# Altium PCB Pannel3.5x3.PcbDoc (part 3 of 4)
Units mil, origin at the board's own origin, x right, y up, seen from the top; angles counter-clockwise.
Board outline 3543.31 x 2771.65 mil, 4 copper layers (SIGNAL, GROUND, PWR, SIGNAL (Bottom)), stack 61.627 mil thick; 234 components, 186 nets, 894 pads, 439 vias.
Unrouted connection lines stored in the file: 4.
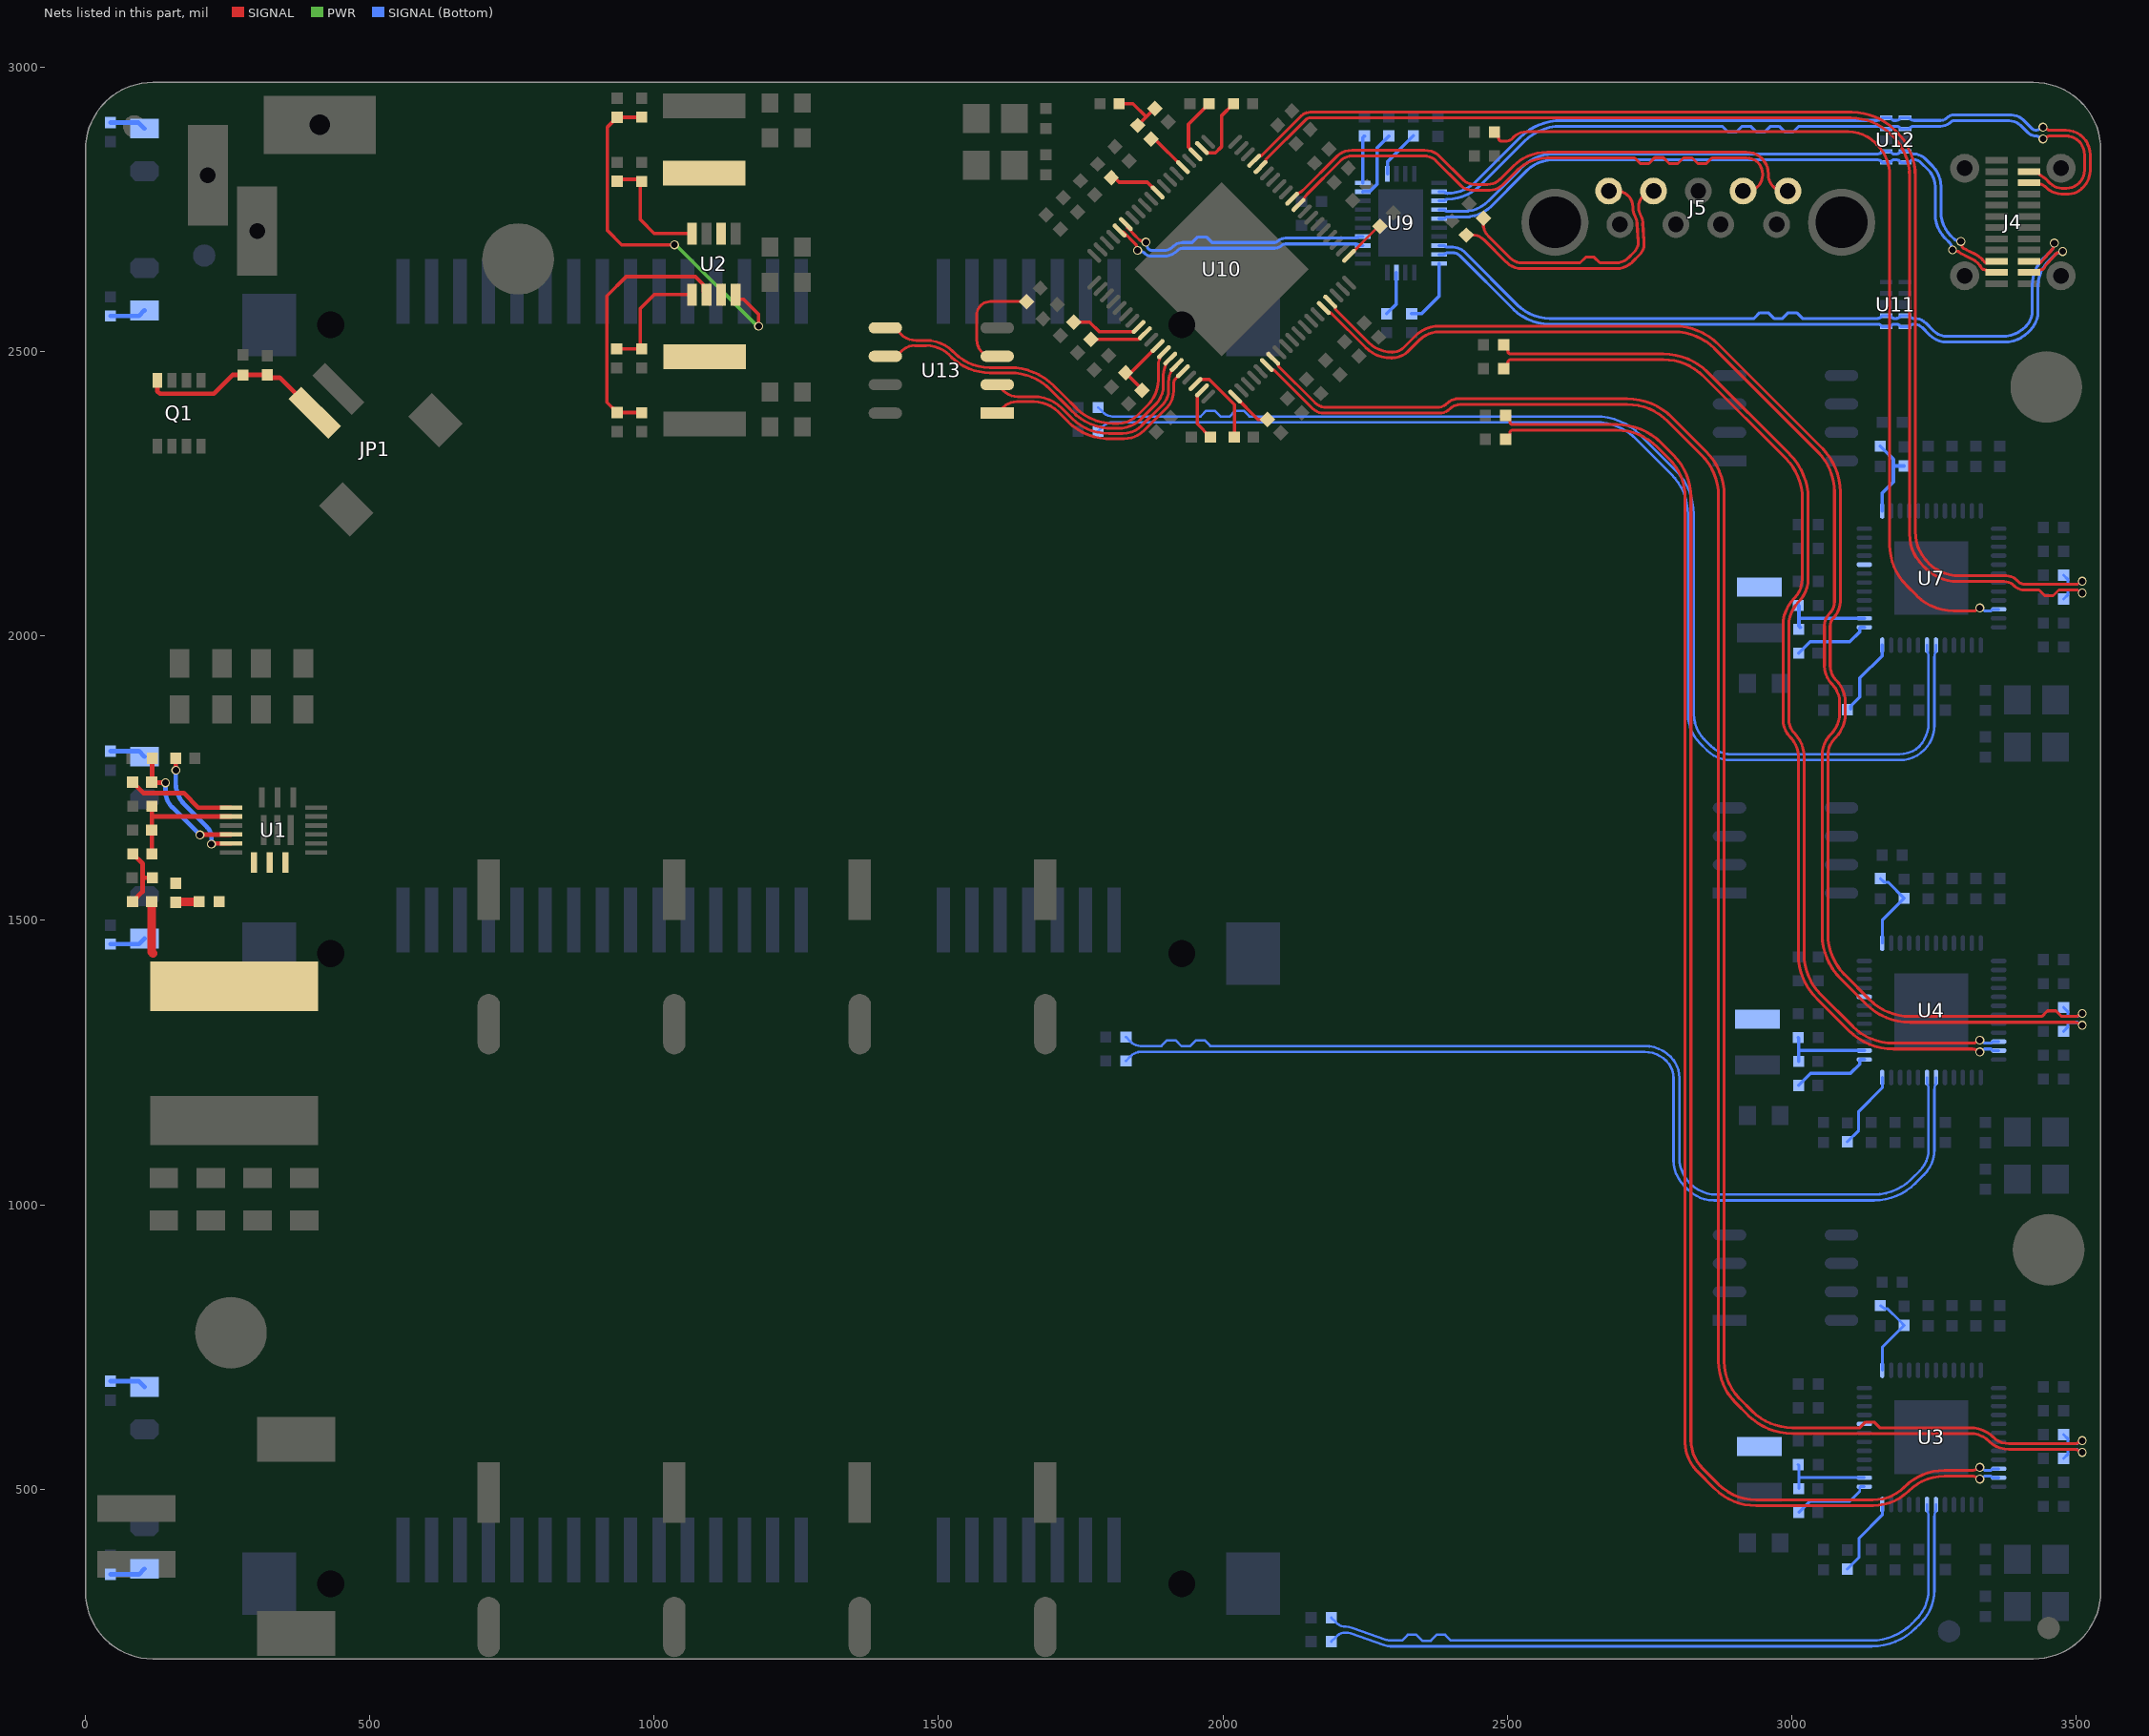
[diagram p5: the nets of this part, all layers, seen from the top]

## Via types
v1: diameter 15.75, hole 11.81, SIGNAL to SIGNAL (Bottom), tented both sides, 439 vias

## Nets (pads, with @x,y where several pads share a name; then routed paths per layer and width w, separated by ;. In a path a pad name is that pad's centre, name@x,y a point inside that pad or via, vN(x,y) a via of type N, cw(c..) or ccw(c..) an arc to the next point about the centre after c; other vN are vias at no path point) (continued)
IN_SSRX2_N: J4.A10 U9.8 U11.4 U11.7 | length 1344.5
  SIGNAL w5.1: J4.A10@3417.35,2659.1 3427.74,2659.1 cw(c3427.74,2650.92) 3433.52,2656.71 3434.48,2656.54 3435.57,2656.54 ccw(c3435.57,2661.64) 3439.65,2658.58 cw(c3473.65,2633.51) 3443.25,2662.85 3443.55,2663.15 ccw(c3439.88,2666.69) 3443.65,2663.26 ; 3443.67,2663.28 3454.16,2675.12 3457.84,2679.27 cw(c3469.21,2669.19) 3458.47,2679.94 ccw(c3454.86,2683.54) 3459.81,2682.3 v1(3462,2691)
  SIGNAL (Bottom) w5.1: U9.8@2379.93,2686.63 2387.78,2686.63 cw(c2387.78,2681.81) 2391.19,2685.22 ccw(c2394.6,2688.63) 2394.6,2683.8 2404.87,2683.8 cw(c2404.87,2656.47) 2424.2,2675.8 2517.9,2582.1 ccw(c2574.82,2639.02) 2574.82,2558.52 2919,2558.52 2934,2558.52 2944,2568.52 2959,2568.52 2969,2558.52 2984,2558.52 2994,2568.52 3009,2568.52 3019,2558.52 3058,2558.52 3150.78,2558.52 ccw(c3150.78,2568.72) 3157.99,2561.51 3157.99,2561.93 3158.68,2562.62 cw(c3160.36,2560.95) 3160.36,2563.32 U11.7@3166.56,2563.32 3171.79,2563.32 cw(c3171.79,2558.58) 3175.13,2561.93 3175.14,2561.51 3176.63,2560.02 ccw(c3180.24,2563.62) 3180.24,2558.52 3183.65,2558.52 ccw(c3183.65,2568.72) 3190.86,2561.51 3190.86,2561.93 3191.56,2562.62 cw(c3193.23,2560.95) 3193.23,2563.32 U11.4@3199.44,2563.32 3205.64,2563.32 cw(c3205.64,2560.95) 3207.32,2562.62 3208.01,2561.93 3208.01,2561.51 ccw(c3215.22,2568.72) 3215.22,2558.52 3215.85,2558.52 cw(c3215.85,2529.77) 3236.18,2550.1 3249.43,2536.85 ccw(c3273.21,2560.63) 3273.21,2527 3370.32,2527 ccw(c3370.32,2585.91) 3411.97,2544.25 ; 3411.99,2544.28 ccw(c3384.6,2571.62) 3423.31,2571.62 3423.31,2616.89 cw(c3490.62,2616.89) 3443.02,2664.49 3457.3,2678.77 ; 3457.31,2678.78 ccw(c3450.87,2685.2) 3459.96,2685.2 3459.96,2686.08 cw(c3466.92,2686.08) v1(3462,2691)
IN_SSRX2_P: J4.A11 U9.9 U11.5 U11.6 | length 1346.8
  SIGNAL w5.1: J4.A11@3417.35,2639.42 3427.74,2639.42 ccw(c3427.74,2647.6) 3433.52,2641.81 cw(c3439.3,2636.03) 3439.3,2644.21 ccw(c3439.3,2649.31) 3443.5,2646.41 3447.22,2651.8 cw(c3473.65,2633.51) 3450.55,2655.86 3450.81,2656.14 ccw(c3439.88,2666.69) 3451.23,2656.58 3462.2,2668.96 3464.74,2671.83 3465.4,2672.57 cw(c3469.21,2669.19) 3467.97,2674.13 v1(3476.67,2676.33)
  SIGNAL (Bottom) w5.1: U9.9@2379.93,2670.88 2387.78,2670.88 ccw(c2387.78,2675.7) 2391.19,2672.29 cw(c2394.6,2668.88) 2394.6,2673.7 2404.79,2673.7 cw(c2404.79,2656.27) 2417.11,2668.61 2510.76,2574.96 ccw(c2574.82,2639.02) 2510.85,2574.87 ccw(c2574.82,2639.02) 2574.69,2548.42 ccw(c2574.82,2639.02) 2574.82,2548.42 3150.78,2548.42 cw(c3150.78,2538.22) 3157.99,2545.44 3157.99,2545.02 3158.68,2544.32 ccw(c3160.36,2546) 3160.36,2543.63 U11.6@3166.56,2543.63 3171.79,2543.63 ccw(c3171.79,2548.37) 3175.13,2545.01 3175.14,2545.43 3176.63,2546.93 cw(c3180.24,2543.32) 3180.24,2548.42 3183.65,2548.42 cw(c3183.65,2538.22) 3190.86,2545.44 3190.86,2545.02 3191.56,2544.32 ccw(c3193.23,2546) 3193.23,2543.63 U11.5@3199.44,2543.63 3205.64,2543.63 ccw(c3205.64,2546) 3207.32,2544.32 3208.01,2545.02 3208.01,2545.43 cw(c3215.22,2538.22) 3215.22,2548.42 cw(c3215.22,2528.25) 3229.47,2542.53 ; 3229.49,2542.51 3242.36,2529.64 ccw(c3273.12,2560.41) 3273.12,2516.9 3374.5,2516.9 ccw(c3374.5,2575.81) 3416.15,2534.15 3419.19,2537.19 ccw(c3384.85,2571.52) 3433.41,2571.52 3433.41,2616.77 cw(c3490.93,2616.77) 3450.23,2657.42 ; 3450.26,2657.44 3464.44,2671.63 cw(c3470.87,2665.2) 3470.87,2674.29 3471.75,2674.29 ccw(c3471.75,2681.25) v1(3476.67,2676.33)
IN_SSTX1_N: J4.A3 U9.2 U12.1 U12.10 | length 1402.5
  SIGNAL w5.1: J4.A3@3417.35,2796.9 ccw(c3420.44,2799.99) 3420.44,2795.62 3430.45,2795.62 cw(c3430.45,2770.67) 3448.09,2788.31 ccw(c3474.51,2814.73) 3474.51,2777.37 3487.85,2777.37 ccw(c3487.85,2808.7) 3509.62,2786.17 ccw(c3487.85,2808.7) 3510.01,2786.55 3513.03,2789.57 ccw(c3483.88,2818.71) 3525.1,2818.71 3525.1,2846.47 ccw(c3482.32,2846.47) 3512.57,2876.71 3512.39,2876.9 ccw(c3482.14,2846.65) 3482.14,2889.42 3453.97,2889.42 cw(c3453.97,2898.51) 3447.54,2892.09 3446.92,2892.71 ccw(c3442,2887.79) v1(3442,2894.75)
  SIGNAL (Bottom) w5.1: U9.2@2379.93,2781.11 2387.78,2781.11 cw(c2387.78,2776.3) U9.2@2391.17,2779.71 ; U9.2@2391.19,2779.69 ccw(c2394.59,2783.1) 2394.59,2778.29 ccw(c2394.59,2850) 2445.26,2799.26 ; 2445.29,2799.29 2522.53,2876.53 cw(c2595.08,2803.98) 2522.61,2876.61 cw(c2595.08,2803.98) 2595.08,2906.58 3150.78,2906.58 ccw(c3150.78,2916.78) 3157.99,2909.56 3157.99,2909.98 3158.68,2910.68 cw(c3160.36,2909) 3160.36,2911.37 U12.10@3166.56,2911.37 3171.79,2911.37 cw(c3171.79,2906.63) 3175.13,2909.99 3175.14,2909.57 3176.63,2908.07 ccw(c3180.24,2911.68) 3180.24,2906.58 3183.65,2906.58 ccw(c3183.65,2916.78) 3190.86,2909.56 3190.86,2909.98 3191.56,2910.68 cw(c3193.23,2909) 3193.23,2911.37 U12.1@3199.44,2911.37 3205.64,2911.37 cw(c3205.64,2909) 3207.32,2910.68 3208.01,2909.98 3208.01,2909.57 ccw(c3215.22,2916.78) 3215.22,2906.58 3261.98,2906.58 ccw(c3261.98,2922.83) 3273.48,2911.34 cw(c3284.97,2899.84) 3284.97,2916.1 3386.61,2916.1 cw(c3386.61,2886.59) 3407.48,2907.46 3422.59,2892.35 ccw(c3429.65,2899.42) 3428.17,2889.54 ccw(c3429.65,2899.42) 3429.65,2889.42 ccw(c3429.65,2899.42) 3436.72,2892.35 3437.08,2892.71 cw(c3442,2887.79) v1(3442,2894.75)
IN_SSTX1_P: J4.A2 U9.3 U12.2 U12.9 | length 1398.9
  SIGNAL w5.1: J4.A2@3417.35,2816.58 3423.51,2816.58 cw(c3423.51,2798.21) 3436.49,2811.22 3436.56,2811.15 ccw(c3440.14,2814.78) 3437.27,2810.56 3439.07,2809.36 3445.92,2804.77 3454.56,2796.12 ; v1(3442,2874) ccw(c3442,2880.96) 3446.92,2876.04 3447.54,2876.66 cw(c3453.97,2870.24) 3453.97,2879.32 3482.01,2879.32 cw(c3482.01,2846.34) 3505.32,2869.68 ; 3454.58,2796.1 ccw(c3475.44,2817) 3475.44,2787.47 3483.66,2787.47 ccw(c3483.66,2818.8) 3505.82,2796.65 ccw(c3483.66,2818.8) 3515,2818.8 3515,2846.34 ccw(c3482.01,2846.34) 3505.36,2869.64
  SIGNAL (Bottom) w5.1: U9.3@2379.93,2765.37 2387.78,2765.37 ccw(c2387.78,2770.18) U9.3@2391.17,2766.77 ; U9.3@2391.19,2766.79 cw(c2394.59,2763.38) 2394.59,2768.19 2394.68,2768.19 ccw(c2394.68,2849.77) 2452.37,2792.08 2529.64,2869.36 cw(c2595.11,2803.89) 2595.11,2896.48 2863,2896.48 2878,2896.48 2888,2886.48 2903,2886.48 2913,2896.48 2928,2896.48 2938,2886.48 2953,2886.48 2963,2896.48 2978,2896.48 2988,2886.48 3003,2886.48 3013,2896.48 3038,2896.48 3150.78,2896.48 cw(c3150.78,2886.28) 3157.99,2893.49 3157.99,2893.07 3158.68,2892.38 ccw(c3160.36,2894.05) 3160.36,2891.68 U12.9@3166.56,2891.68 3171.79,2891.68 ccw(c3171.79,2896.42) 3175.13,2893.07 3175.14,2893.49 3176.63,2894.98 cw(c3180.24,2891.38) 3180.24,2896.48 3183.65,2896.48 cw(c3183.65,2886.28) 3190.86,2893.49 3190.86,2893.07 3191.56,2892.38 ccw(c3193.23,2894.05) 3193.23,2891.68 U12.2@3199.44,2891.68 3205.64,2891.68 ccw(c3205.64,2894.05) 3207.32,2892.38 3208.01,2893.07 3208.01,2893.49 cw(c3215.22,2886.28) 3215.22,2896.48 3262.02,2896.48 ccw(c3262.02,2922.73) 3280.59,2904.17 cw(c3285.01,2899.75) 3285.01,2906 3382.43,2906 cw(c3382.43,2876.49) 3403.29,2897.36 3415.8,2884.85 ccw(c3429.15,2898.2) 3424.22,2879.98 ccw(c3429.15,2898.2) 3429.15,2879.32 cw(c3429.15,2868.1) v1@3437.07,2876.05 ; v1@3437.08,2876.04 ccw(c3442,2880.96) v1(3442,2874)
IN_SSTX2_N: J4.B2 U9.5 U12.5 U12.6 | length 1154.6
  SIGNAL w5.1: v1(3283,2679) 3291.7,2676.8 cw(c3290.46,2671.86) 3294.06,2675.47 ccw(c3304.81,2686.21) 3298.01,2672.62 3311.94,2665.65 3318.73,2662.26 cw(c3304.36,2633.51) 3327.06,2656.26 cw(c3304.36,2633.51) 3327.11,2656.21 cw(c3304.36,2633.51) 3330.81,2651.76 3334.47,2646.45 ; 3334.48,2646.45 ccw(c3338.7,2649.31) 3338.7,2644.21 cw(c3338.7,2636.03) J4.B2@3344.47,2641.83 ; J4.B2@3344.49,2641.8 ccw(c3350.26,2647.6) 3350.26,2639.42 J4.B2@3360.66,2639.42
  SIGNAL (Bottom) w5.1: U9.5@2379.93,2733.87 2387.78,2733.87 ccw(c2387.78,2738.69) 2391.19,2735.28 cw(c2394.6,2731.87) 2394.6,2736.7 2425.88,2736.7 ccw(c2425.88,2802.12) 2472.14,2755.86 2527.97,2811.69 2534.64,2818.36 cw(c2580.67,2772.33) 2580.67,2837.42 3150.78,2837.42 cw(c3150.78,2827.22) 3157.99,2834.44 3157.99,2834.02 3158.68,2833.32 ccw(c3160.36,2835) 3160.36,2832.63 U12.6@3166.56,2832.63 3171.79,2832.63 ccw(c3171.79,2837.37) 3175.13,2834.01 3175.14,2834.43 3176.63,2835.93 cw(c3180.24,2832.32) 3180.24,2837.42 3183.65,2837.42 cw(c3183.65,2827.22) 3190.86,2834.44 3190.86,2834.02 3191.56,2833.32 ccw(c3193.23,2835) 3193.23,2832.63 U12.5@3199.44,2832.63 3205.64,2832.63 ccw(c3205.64,2835) 3207.32,2833.32 3208.01,2834.02 3208.01,2834.43 cw(c3215.22,2827.22) 3215.22,2837.42 cw(c3215.22,2819.66) 3227.78,2832.22 3240.22,2819.78 ; 3240.25,2819.75 cw(c3210.63,2790.19) 3252.48,2790.19 3252.48,2742.29 ccw(c3313.39,2742.29) 3270.22,2699.31 ccw(c3313.39,2742.29) 3270.32,2699.21 3278.3,2691.23 ; 3278.31,2691.22 cw(c3271.87,2684.8) 3280.96,2684.8 3280.96,2683.92 ccw(c3287.92,2683.92) v1(3283,2679)
IN_SSTX2_P: J4.B3 U9.4 U12.4 U12.7 | length 1151.3
  SIGNAL w5.1: v1(3297.67,2693.67) 3299.87,2684.97 ccw(c3304.81,2686.21) 3301.2,2682.61 ccw(c3304.81,2686.21) 3302.53,2681.65 3307.11,2679.36 3314.33,2675.75 3323.25,2671.29 cw(c3304.36,2633.51) 3334.17,2663.43 cw(c3304.36,2633.51) 3334.27,2663.33 cw(c3304.36,2633.51) 3338.31,2658.64 ccw(c3342.43,2661.64) 3342.43,2656.54 3343.52,2656.54 3344.48,2656.7 cw(c3350.26,2650.92) 3350.26,2659.1 J4.B3@3360.66,2659.1
  SIGNAL (Bottom) w5.1: U9.4@2379.93,2749.62 2387.78,2749.62 cw(c2387.78,2744.8) 2391.19,2748.21 ccw(c2394.6,2751.62) 2394.6,2746.8 2423.79,2746.8 ccw(c2423.79,2807.17) 2466.45,2764.45 ; 2466.48,2764.48 2517.87,2815.87 2527.59,2825.59 cw(c2580.54,2772.65) 2527.66,2825.66 cw(c2580.54,2772.65) 2580.54,2847.52 3150.78,2847.52 ccw(c3150.78,2857.72) 3157.99,2850.51 3157.99,2850.93 3158.68,2851.62 cw(c3160.36,2849.95) 3160.36,2852.32 U12.7@3166.56,2852.32 3171.79,2852.32 cw(c3171.79,2847.58) 3175.13,2850.93 3175.14,2850.51 3176.63,2849.02 ccw(c3180.24,2852.62) 3180.24,2847.52 3183.65,2847.52 ccw(c3183.65,2857.72) 3190.86,2850.51 3190.86,2850.93 3191.56,2851.62 cw(c3193.23,2849.95) 3193.23,2852.32 U12.4@3199.44,2852.32 3205.64,2852.32 cw(c3205.64,2849.95) 3207.32,2851.62 3208.01,2850.93 3208.01,2850.51 ccw(c3215.22,2857.72) 3215.22,2847.52 3215.3,2847.52 cw(c3215.3,2819.85) 3234.87,2839.42 3247.46,2826.82 cw(c3210.98,2790.34) 3262.58,2790.34 3262.58,2746.47 ccw(c3323.49,2746.47) 3280.33,2703.49 ccw(c3323.49,2746.47) 3280.42,2703.39 3285.44,2698.37 ccw(c3291.87,2704.8) 3291.87,2695.71 3292.75,2695.71 cw(c3292.75,2688.75) v1(3297.67,2693.67)
LXO-A: L4.1 U3.44
LXO-B: L5.1 U4.44
LXO-C: L6.1 U7.44
NetC1_1: C1.1 R1.2 | length 41.4
  SIGNAL w15: R1.2@159,1532 159.5,1532.5 199.5,1532.5 C1.1@200,1533
NetC1_2: C1.2 L1.2 R2.1 U1.2 U1.3 | length 91.9
  SIGNAL w15: R2.1@116.73,1533 116.73,1444.27 119,1442
NetC2_2: C2.2 R2.2 R4.1 | length 115.5
  SIGNAL w8: R2.2@83.27,1533 100.56,1550.29 100.56,1557.71 100.68,1557.84 100.68,1575 ; R4.1@83.52,1617 100.68,1599.84 100.68,1575 ; C2.2@117.84,1575 100.68,1575
NetC11_2: C11.2 R6.1 U1.16 | length 237.4
  SIGNAL w8: C11.2@117.84,1785 117.29,1784.45 117.29,1743.55 R6.1@116.73,1743 117.23,1742.5 140.5,1742.5 v1(141,1742) ; v1(201.44,1650.29) 202.2,1651.06 256.22,1651.06 U1.16@256.28,1651.12
  SIGNAL (Bottom) w8: v1(141,1742) 141,1726.37 ccw(c178.74,1726.37) 152.05,1699.68 v1(201.44,1650.29)
NetC30_2: C30.2 R26.2 U3.38 | length 158.3
  SIGNAL (Bottom) w5: C30.2@3011.57,543 3012.55,542.02 3012.55,521.51 ; R26.2@3012.55,501 3012.55,521.51 ; U3.38@3127.89,520.13 3013.93,520.13 3012.55,521.51
NetC31_2: C31.2 R27.2 U4.38 | length 157.7
  SIGNAL (Bottom) w6: C31.2@3011.57,1294 3012.55,1293.02 3012.55,1271.13 ; R27.2@3012.55,1252 3012.55,1271.13 ; U4.38@3127.89,1271.13 3012.55,1271.13
NetC36_1: C36.1 R30.2 U3.1 | length 150.8
  SIGNAL (Bottom) w5: C36.1@3156,822.72 3163.34,817.57 3166.73,817.57 ccw(c3168.65,835.33) 3168.65,817.47 3190.66,795.46 R30.2@3198,788.14 3159.39,749.53 U3.1@3159.39,709.11
NetC37_1: C37.1 R31.2 U4.1 | length 151.3
  SIGNAL (Bottom) w5: C37.1@3156,1573.72 3162.43,1567.28 3169.86,1567.28 R31.2@3198,1539.14 3159.39,1500.53 U4.1@3159.39,1460.11
NetC74_2: C74.2 R34.2 U7.38 | length 159.6
  SIGNAL (Bottom) w6: C74.2@3011.57,2058.18 C74.2@3011.57,2054 3013,2052.57 3013,2031.13 ; R34.2@3012.71,2017.71 R34.2@3015.48,2014.93 ; R34.2@3013,2018 3013,2031.13 ; U7.38@3127.89,2031.13 3013,2031.13
NetC77_1: C77.1 R36.2 U7.1 | length 150.3
  SIGNAL (Bottom) w6: C77.1@3156,2333.72 3162.67,2327.05 3179,2310.72 3179,2299.14 ; U7.1@3159.39,2220.11 3159.39,2251.39 3179,2271 3179,2299.14 ; R36.2@3198,2299.14 3179,2299.14
NetC97_1: C97.1 R40.1 U10.68 | length 113
  SIGNAL w6: C97.1@1831.5,2460.5 1858,2434 R40.1@1858,2432 ; C97.1@1832,2461 1836.2,2461 U10.68@1885.22,2510.01
NetC127_2: C127.2 JP1.1 Q1.1 R11.2 | length 339.4
  SIGNAL w8: Q1.1@126.61,2449.87 126.61,2430.69 131.3,2426 226,2426 259.13,2459.13 C127.2@277.13,2459.13 ; C127.2@277,2459 C127.2@277.13,2459.13 ; JP1.1@403.37,2392.87 341.84,2454.4 324.87,2454.4 R11.2@320,2459.27 319.87,2459.13 C127.2@277.13,2459.13
NetL2_2: L2.2 U2.6
NetL3_2: L3.2 U2.3
NetLED3_1: LED3.1 R20.2 | length 64.1
  SIGNAL (Bottom) w8: R20.2@44,689.73 94.23,689.73 LED3.1@104.01,679.96
NetLED4_1: LED4.1 R21.2 | length 64.1
  SIGNAL (Bottom) w8: R21.2@44,350.27 94.21,350.27 LED4.1@104,360.05
NetLED5_1: LED5.1 R22.2 | length 64.1
  SIGNAL (Bottom) w8: R22.2@44,1797.73 94.21,1797.73 LED5.1@104.01,1787.94
NetLED6_1: LED6.1 R23.2 | length 64
  SIGNAL (Bottom) w8: R23.2@44,1458.27 94.23,1458.27 LED6.1@104,1468.03
NetLED7_1: LED7.1 R24.2 | length 64.3
  SIGNAL (Bottom) w8: R24.2@44,2902.73 93.68,2902.73 LED7.1@104.01,2892.4
NetLED8_1: LED8.1 R25.2 | length 63.9
  SIGNAL (Bottom) w8: R25.2@44,2563 94.5,2563 LED8.1@104,2572.5
NetR1_1: R1.1 U1.1
NetR3_2: R3.2 U1.17 | length 208.3
  SIGNAL w8: v1(159,1764) R3.2@159,1785 ; v1(221.81,1634.18) 222.94,1635.32 256.22,1635.32 U1.17@256.28,1635.38
  SIGNAL (Bottom) w8: v1(159,1764) 159,1741.5 ccw(c213.32,1741.5) 174.91,1703.09 214.02,1663.98 cw(c195.24,1645.19) 221.81,1645.19 v1(221.81,1634.18)
NetR4_2: R4.2 R5.1 R7.2 U1.14 | length 224.3
  SIGNAL w8: R4.2@116.99,1617 116.99,1680.13 ; R7.2@116.99,1701 116.99,1680.13 ; U1.14@256.28,1682.62 119.48,1682.62 116.99,1680.13
NetR6_2: R6.2 U1.13 | length 191.5
  SIGNAL w8: R6.2@83.27,1743 102.27,1724 173,1724 198.63,1698.37 U1.13@256.28,1698.37
NetR8_1: R8.1 U13.3 | length 199.1
  SIGNAL w5: 1574.29,2581.24 ccw(c1591,2564.56) 1567.4,2564.56 1567.4,2519.9 ccw(c1595.3,2519.9) 1575.55,2500.19 ; 1574.33,2581.27 cw(c1591,2564.56) 1591,2588.17 R8.1@1655.17,2588.17 ; 1575.57,2500.17 1583.74,2492 U13.3@1603.43,2492
NetR9_2: R9.2 R12.1 U2.4 | length 661.7
  SIGNAL w6: R12.1@978,2912.27 977.75,2912.01 R9.2@935,2912.01 918.16,2895.17 918.16,2712.84 943,2688 v1(1036,2688) ; U2.4@1143.39,2600.25 1143.39,2597.68 1148.89,2592.18 1157.37,2592.18 1183.71,2565.84 v1(1183.71,2544.7)
  PWR w6: v1(1036,2688) 1038.2,2688 1181.5,2544.7 v1(1183.71,2544.7)
NetR10_2: R10.2 R13.1 U2.2 | length 464.9
  SIGNAL w6: R13.1@978,2392.73 977.75,2392.99 R10.2@935,2392.99 917.16,2410.83 917.16,2598.16 951,2632 1072.51,2632 1086.7,2617.81 1086.7,2605.75 U2.2@1092.2,2600.25
NetR14_2: R14.2 R16.1 U2.8 | length 216.6
  SIGNAL w6: R16.1@934,2803.25 934.25,2803 978,2803 976,2801 976,2732 1000.25,2707.75 U2.8@1066.61,2707.75
NetR15_2: R15.2 R17.1 U2.1 | length 216.6
  SIGNAL w6: R17.1@934,2504.75 934.25,2505 R15.2@978,2505 976,2507 976,2576 1000.25,2600.25 U2.1@1066.61,2600.25
NetR28_2: R28.2 U3.37 | length 138.1
  SIGNAL (Bottom) w5: R28.2@3012.55,459 3032.55,479 3102.5,479 3119.88,496.38 3119.88,503.06 3121.21,504.39 U3.37@3127.89,504.39
NetR29_2: R29.2 U4.37 | length 138.4
  SIGNAL (Bottom) w6: R29.2@3012.55,1210 3033.55,1231 3103.5,1231 3119.82,1247.32 3119.82,1254.52 3120.69,1255.39 U4.37@3127.89,1255.39
NetR32_2: R32.2 U3.36 | length 138.6
  SIGNAL (Bottom) w5: R32.2@3098,359.68 3119,380.68 3119,414.14 3159.39,454.53 U3.36@3159.39,472.89
NetR33_2: R33.2 U4.36 | length 138.6
  SIGNAL (Bottom) w5: R33.2@3098,1110.68 3118,1130.68 3118,1164.14 3159.39,1205.53 U4.36@3159.39,1223.89
NetR35_2: R35.2 U7.37 | length 138.4
  SIGNAL (Bottom) w6: R35.2@3012.55,1970 3032.55,1990 3102.5,1990 3119.82,2007.32 3119.82,2014.52 3120.69,2015.39 U7.37@3127.89,2015.39
NetR37_2: R37.2 U7.36 | length 134.8
  SIGNAL (Bottom) w6: R37.2@3104,1872 3104,1876.68 3120.01,1892.69 3120.01,1926.16 3159.03,1965.17 3159.03,1983.53 U7.36@3159.39,1983.89
NetR38_2: R38.2 U9.24 | length 83.6
  SIGNAL (Bottom) w6: U9.24@2246.07,2796.87 2246.07,2876.34 R38.2@2249,2879.27
NetR39_2: R39.2 U9.23 | length 124.1
  SIGNAL (Bottom) w6: U9.23@2246.07,2781.12 2247.01,2782.06 2258.87,2782.06 2270.94,2794.12 2270.94,2858.2 R39.2@2292,2879.27
NetR41_1: R41.1 U10.66 | length 99.2
  SIGNAL w6: R41.1@1768,2522 1852.29,2522 1862.51,2532.22 U10.66@1863.01,2532.22
NetR42_1: R42.1 U10.65 | length 124.3
  SIGNAL w6: R42.1@1738,2552 1747.68,2552 1765.77,2552 1782.73,2535.04 1843.49,2535.04 U10.65@1851.84,2543.39
NetR43_1: R43.1 U10.75 | length 106.9
  SIGNAL w6: U10.75@1971.56,2440.37 U10.75@1963.21,2432.02 1954.86,2423.67 1954.86,2373.14 R43.1@1978,2350
NetR44_1: R44.1 U10.74 | length 147.2
  SIGNAL w6: U10.74@1952.04,2443.19 1960.39,2451.54 1975.6,2451.54 1975.83,2451.31 1976.09,2451.31 1993.6,2433.8 1993.6,2433.54 2020.27,2406.87 R44.1@2020.27,2350
NetR45_1: R45.1 U9.25 | length 85.8
  SIGNAL (Bottom) w6: U9.25@2289.38,2812.62 2289.38,2833.9 R45.1@2335,2879.52
NetR46_2: R46.2 U9.13 | length 79.7
  SIGNAL (Bottom) w6: R46.2@2288,2566.73 2305.12,2583.85 U9.13@2305.12,2639.38
NetR47_2: R47.2 U9.10 | length 118.6
  SIGNAL (Bottom) w6: R47.2@2332,2566.73 2349.73,2566.73 2379.93,2596.93 U9.10@2379.93,2655.13
NetR48_1: R48.1 U10.1 | length 73.1
  SIGNAL w6: U10.1@2021.69,2420.92 2061.77,2380.83 R48.1@2078.17,2380.83
NetR49_1: R49.1 U10.47 | length 92.2
  SIGNAL w6: R49.1@1803.83,2806.17 1809.17,2806.17 1817.34,2798 1867.2,2798 U10.47@1885.22,2779.99
NetR50_1: R50.1 R51.2 R53.1 | length 99.5
  SIGNAL w6: R50.1@1817.73,2936 1842,2936 1865.17,2912.83 ; R51.2@1850.17,2897.83 1865.17,2912.83 ; R53.1@1880.17,2927.83 1865.17,2912.83
NetR51_1: R51.1 U10.43 | length 76.5
  SIGNAL w6: R51.1@1873.83,2874.17 1880.13,2874.17 U10.43@1929.76,2824.53
NetR52_1: R52.1 U10.41 | length 109.4
  SIGNAL w6: U10.41@1952.04,2846.81 1952.04,2847.12 1939.55,2859.61 1939.55,2899.82 1968.89,2929.16 R52.1@1975.73,2936
NetR54_1: R54.1 U10.40 | length 126.9
  SIGNAL w6: U10.40@1963.21,2857.98 1971.56,2849.63 1987.03,2849.63 1997.54,2860.14 1997.54,2914.54 R54.1@2019,2936
NetR55_1: R55.1 U10.20 | length 75.1
  SIGNAL w5.1: U10.20@2222.08,2668.69 2271.72,2718.33 cw(c2276.17,2713.88) R55.1@2276.17,2720.17
RX1_N: C26.2 U3.31 | length 1278.2
  SIGNAL (Bottom) w4.29: C26.2@2190.72,274 2198.41,266.3 2198.46,266.25 ccw(c2216.26,281.74) 2216.26,258.14 cw(c2216.26,224.26) 2227.47,256.24 2227.68,256.16 2287.26,235.33 ccw(c2295.06,257.6) 2291.06,234.34 ccw(c2295.06,257.6) 2295.06,234 2315.14,234 2325.14,244 2340.14,244 2350.57,233.57 2365.57,233.57 2376,244 2391,244 2401,234 2416,234 3140.58,234 ccw(c3140.58,334) 3211.29,263.29 3219.54,271.54 ; 3222.55,274.55 3219.54,271.54 ; U3.31@3238.13,472.89 3238.13,463.05 cw(c3217.26,452.03) 3240.86,452.03 3240.86,423.93 3240.86,323 cw(c3168.08,323) 3219.54,271.54
RX1_P: C29.2 U3.30 | length 1273.2
  SIGNAL (Bottom) w4.29: C29.2@2190.72,232 2198.41,239.7 cw(c2216.26,224.26) 2224.06,246.53 2224.27,246.45 ; 2224.3,246.44 2283.86,225.62 ccw(c2295.06,257.6) 2295.06,223.71 3140.62,223.71 ccw(c3140.62,333.89) 3218.53,255.98 3226.84,264.28 ccw(c3168.15,322.97) 3226.88,264.33 ccw(c3168.15,322.97) 3251.15,322.97 3251.15,423.93 3251.15,452.03 cw(c3274.74,452.03) 3253.87,463.05 U3.30@3253.87,472.89
RX2_N: C25.2 U4.31 | length 1808.1
  SIGNAL (Bottom) w4.29: C25.2@1829.72,1295 1837.41,1287.3 1837.45,1287.26 ccw(c1855.26,1302.74) 1855.26,1279.14 1877,1279.14 1892,1279.14 1902,1289.14 1917,1289.14 1927.43,1278.72 1942.43,1278.72 1952.86,1289.14 1967.86,1289.14 1977.86,1279.14 2008,1279.14 2741.87,1279.14 cw(c2741.87,1215.07) 2787.17,1260.38 2787.37,1260.18 cw(c2750.34,1223.16) 2802.71,1223.16 2802.71,1083.37 ccw(c2868.08,1083.37) 2821.85,1037.15 ccw(c2868.08,1083.37) 2868.08,1018 3145,1018 ccw(c3145,1110.82) 3210.63,1045.19 3225.59,1060.14 ccw(c3188.73,1097) 3240.86,1097 3240.86,1203.03 ccw(c3217.26,1203.03) 3238.14,1214.03 U4.31@3238.13,1223.89
RX2_P: C28.2 U4.30 | length 1808.2
  SIGNAL (Bottom) w4.29: C28.2@1829.72,1253 1837.41,1260.7 cw(c1855.26,1245.26) 1855.26,1268.86 2741.72,1268.86 cw(c2741.72,1214.72) 2780,1253 cw(c2750.02,1223.02) 2792.42,1223.02 2792.42,1079.11 ccw(c2857.79,1079.11) 2811.52,1032.93 ccw(c2857.79,1079.11) 2811.56,1032.88 2817.59,1026.86 ccw(c2863.82,1073.08) 2863.82,1007.71 3145.09,1007.71 ccw(c3145.09,1110.6) 3217.85,1037.85 3232.91,1052.91 ccw(c3188.88,1096.94) 3251.14,1096.94 3251.15,1203.03 cw(c3274.74,1203.03) 3253.87,1214.05 U4.30@3253.87,1223.89
RX3_N: C24.2 U7.31 | length 2133.7
  SIGNAL (Bottom) w4.29: C24.2@1780.72,2402 1788.41,2394.3 1788.45,2394.26 ccw(c1806.26,2409.74) 1806.26,2386.14 1946,2386.14 1961,2386.14 1971,2396.14 1986,2396.14 1996.43,2385.72 2011.43,2385.72 2021.86,2396.14 2036.86,2396.14 2046.86,2386.14 2062,2386.14 2655.77,2386.14 cw(c2655.77,2275.97) 2733.68,2353.87 2795.73,2291.82 cw(c2717.82,2213.91) 2828,2213.91 2828,1863.06 ccw(c2890.91,1863.06) 2846.42,1818.58 2857.94,1807.06 ccw(c2894,1843.12) 2894,1792.12 3189.79,1792.12 ccw(c3189.79,1843.18) 3224.42,1805.67 ; 3225.89,1807.08 cw(c3189.79,1843.18) 3224.42,1805.67 ; U7.31@3238.13,1983.89 3238.13,1974.05 cw(c3217.26,1963.03) 3240.86,1963.03 3240.86,1847.47 cw(c3179.47,1847.47) 3224.42,1805.67
RX3_P: C27.2 U7.30 | length 2131.4
  SIGNAL (Bottom) w4.29: C27.2@1780.72,2360 1788.41,2367.7 cw(c1806.26,2352.26) 1806.26,2375.86 2655.72,2375.86 cw(c2655.72,2275.86) 2726.43,2346.57 2788.42,2284.58 cw(c2717.71,2213.87) 2817.71,2213.87 2817.71,1863 ccw(c2890.76,1863) 2839.09,1811.36 2850.73,1799.72 ; U7.30@3253.87,1983.89 3253.87,1974.05 ccw(c3274.74,1963.03) 3251.15,1963.03 3251.15,1843.21 cw(c3189.76,1843.21) 3233.17,1799.8 3233.09,1799.72 cw(c3189.9,1842.9) 3189.9,1781.83 2893.91,1781.83 cw(c2893.91,1842.91) 2850.77,1799.68 ; 2850.73,1799.72 ccw(c2893.91,1842.91) 2850.77,1799.68
SPICLK: U10.70 U13.6 | length 629.2
  SIGNAL w5: U13.6@1406.57,2492 1426.44,2492 1435.83,2501.4 cw(c1458.53,2478.71) 1458.53,2510.8 1478.43,2510.8 cw(c1478.43,2452.76) 1519.42,2493.85 cw(c1478.43,2452.76) 1519.47,2493.8 1522.31,2490.97 ccw(c1589.93,2558.73) 1589.92,2463 1625.85,2463 cw(c1625.85,2363) 1696.56,2433.71 1728.64,2401.64 1736.43,2393.84 ccw(c1806,2463.33) 1736.51,2393.76 ccw(c1806,2463.33) 1757.74,2377.66 ccw(c1806,2463.33) 1806,2365 1816,2365 ccw(c1816,2421.84) 1856.18,2381.63 1881.27,2406.73 ; 1881.3,2406.75 ccw(c1846.92,2441.08) 1895.5,2441.08 1895.5,2458.79 cw(c1936.44,2458.79) 1903.28,2482.8 cw(c1936.44,2458.79) U10.70@1907.49,2487.74
SPICS: U10.72 U13.1 | length 418.6
  SIGNAL w5: U13.1@1603.43,2392 1613.43,2402 cw(c1637.57,2377.86) 1637.57,2412 1667.56,2412 cw(c1667.56,2351.04) 1710.66,2394.16 1728.53,2376.29 ccw(c1799.24,2447) 1794.8,2347.1 ccw(c1799.24,2447) 1799.24,2347 1826.49,2347 ccw(c1826.49,2396.51) 1861.5,2361.5 1901,2401 ccw(c1870.82,2431.18) 1913.5,2431.18 1913.5,2444.04 cw(c1925.96,2444.04) 1917.13,2452.83 U10.72@1929.76,2465.47
SPISI: U10.69 U13.5 | length 625.8
  SIGNAL w5: U13.5@1406.57,2542 1422.68,2542 1433.79,2530.9 ccw(c1460.59,2557.7) 1460.59,2519.8 1478.43,2519.8 cw(c1478.43,2452.76) 1525.8,2500.2 cw(c1478.43,2452.76) 1525.86,2500.14 1527.88,2498.12 1528.61,2497.39 ccw(c1589.93,2558.73) 1589.93,2472 1625.85,2472 cw(c1625.85,2363) 1702.91,2440.09 1718.96,2424.04 1742.84,2400.16 ccw(c1806,2463.33) 1806,2374 1816,2374 ccw(c1816,2421.84) 1849.83,2388.01 1868.41,2406.59 ccw(c1824.73,2450.27) 1886.5,2450.27 1886.5,2474.97 cw(c1920.26,2474.97) 1892.49,2494.16 cw(c1920.26,2474.97) U10.69@1896.39,2498.84
SPISO: U10.71 U13.2 | length 413.7
  SIGNAL w5: U13.2@1603.43,2442 1613.93,2431.5 ; 1613.95,2431.47 ccw(c1639.27,2456.85) 1639.27,2421 1667.56,2421 cw(c1667.56,2351.04) 1717,2400.54 cw(c1667.56,2351.04) 1717.07,2400.48 1719.48,2398.07 1722.12,2395.42 1723.99,2393.55 1734.91,2382.63 ccw(c1799.24,2447) 1799.24,2356 1813.45,2356 1823.67,2356 ccw(c1823.67,2403.32) 1857.13,2369.86 1894.64,2407.36 ; 1894.66,2407.39 ccw(c1870.82,2431.18) 1904.5,2431.18 1904.5,2446.79 cw(c1942.19,2446.79) 1915.54,2473.44 U10.71@1918.66,2476.57
SSRX1_N: C66.1 U10.7 | length 3197.8
  SIGNAL w5.1: U10.7@2088.51,2487.74 2097.39,2478.86 2097.39,2474.83 2161.77,2410.45 ; 2161.79,2410.43 ccw(c2182,2430.67) 2182,2402.07 2376.37,2402.07 ccw(c2376.37,2429.63) 2395.84,2410.12 ; 2395.86,2410.14 cw(c2412.91,2393.09) 2412.91,2417.2 2711.46,2417.2 cw(c2711.46,2307.42) 2789.08,2385.05 2849.42,2324.71 cw(c2771.8,2247.08) 2881.58,2247.08 2881.58,724.8 ccw(c2974.8,724.8) 2908.84,658.93 ccw(c2974.8,724.8) 2908.88,658.88 2930.37,637.39 ccw(c3001.08,708.1) 3001.08,608.1 3105,608.1 3120,608.1 3130,618.1 3145,618.1 3155,608.1 3215,608.1 3314.03,608.1 cw(c3314.03,550.48) 3354.78,591.22 ccw(c3381.75,618.2) 3381.75,580.05 3498.15,580.05 ccw(c3498.15,591.27) v1@3506.07,583.33 ; v1@3506.08,583.34 cw(c3511,578.42) v1(3511,585.37)
  SIGNAL (Bottom) w5.1: C66.1@3478.27,596 3485.56,588.71 3485.56,583.04 3488.55,580.05 3502.79,580.05 3508.12,585.37 v1(3511,585.37)
SSRX1_P: C68.1 U10.6 | length 3197.9
  SIGNAL w5.1: U10.6@2077.34,2476.57 2086.22,2467.68 2090.25,2467.68 2157.59,2400.35 ccw(c2177.82,2420.57) 2177.82,2391.97 2380.55,2391.97 ccw(c2380.55,2419.53) 2400.04,2400.04 cw(c2417.09,2382.99) 2417.09,2407.1 2711.32,2407.1 cw(c2711.32,2307.1) 2782.04,2377.81 2842.19,2317.66 cw(c2771.48,2246.95) 2871.48,2246.95 2871.48,724.69 ccw(c2974.53,724.69) 2901.61,651.87 ccw(c2974.53,724.69) 2901.66,651.82 2923.26,630.22 ccw(c3001.05,708.01) 2923.32,630.16 ccw(c3001.05,708.01) 3001.05,598 3313.88,598 cw(c3313.88,550.12) 3347.71,584 ; 3347.77,583.95 ccw(c3381.6,617.83) 3381.6,569.95 3498.15,569.95 cw(c3498.15,558.73) v1@3506.07,566.67 ; v1@3506.08,566.66 ccw(c3511,571.58) v1(3511,564.63)
  SIGNAL (Bottom) w5.1: C68.1@3478.27,554 3485.56,561.29 3485.56,566.96 3488.55,569.95 3502.79,569.95 3508.12,564.63 v1(3511,564.63)
SSRX2_N: C67.1 U10.16 | length 2461.5
  SIGNAL w5.1: U10.16@2188.71,2587.94 2197.59,2579.05 2197.59,2575.02 2256.67,2515.95 ccw(c2297.34,2556.61) 2256.71,2515.9 ccw(c2297.34,2556.61) 2297.34,2499.1 ccw(c2297.34,2529.23) 2318.63,2507.91 ; 2318.64,2507.93 2337.94,2527.22 cw(c2380.86,2484.3) 2380.86,2545 2793.75,2545 cw(c2793.75,2435.22) 2871.37,2512.85 3053.37,2330.85 cw(c2975.74,2253.22) 3085.52,2253.22 3085.52,2060.57 cw(c3045.28,2060.57) 3073.74,2032.12 ; 3073.72,2032.09 ccw(c3087.83,2018) 3067.88,2018 3067.88,1947.74 ccw(c3103.39,1947.74) 3078.26,1922.66 ; 3078.31,1922.6 cw(c3039.1,1883.44) 3094.51,1883.44 3094.51,1864.28 cw(c3032.32,1864.28) 3076.3,1820.3 ccw(c3105.99,1790.61) 3064,1790.61 3064,1475.42 ccw(c3164,1475.42) 3093.29,1404.71 3137.66,1360.34 ccw(c3208.37,1431.05) 3208.37,1331.05 3425,1331.05 3440,1331.05 3450,1341.05 3465,1341.05 3475,1331.05 3497,1331.05 3498.15,1331.05 ccw(c3498.15,1342.27) v1@3506.07,1334.33 ; v1@3506.08,1334.34 cw(c3511,1329.42) v1(3511,1336.37)
  SIGNAL (Bottom) w5.1: C67.1@3478.27,1347 3485.56,1339.71 3485.56,1334.04 3488.55,1331.05 3502.79,1331.05 3508.12,1336.37 v1(3511,1336.37)
SSRX2_P: C69.1 U10.15 | length 2461.3
  SIGNAL w5.1: U10.15@2177.53,2576.76 2186.42,2567.88 2190.45,2567.88 2250.6,2507.73 ; 2250.63,2507.7 ccw(c2295.82,2552.95) 2295.82,2489 2297.44,2489 ccw(c2297.44,2528.99) 2325.71,2500.71 2345,2520 cw(c2380.97,2484.03) 2380.97,2534.9 2793.61,2534.9 cw(c2793.61,2434.9) 2864.32,2505.61 3046.13,2323.8 cw(c2975.42,2253.09) 3075.42,2253.09 3075.42,2060.67 cw(c3045.04,2060.67) 3066.54,2039.2 ccw(c3087.63,2018.08) 3057.78,2018.08 3057.78,1947.65 ccw(c3103.18,1947.65) 3071.06,1915.57 ; 3071.1,1915.53 cw(c3038.95,1883.39) 3084.41,1883.39 3084.41,1864.38 cw(c3032.06,1864.38) 3069.08,1827.36 ccw(c3105.73,1790.72) 3053.9,1790.72 3053.9,1475.38 ccw(c3163.91,1475.38) 3086.06,1397.65 ccw(c3163.91,1475.38) 3086.12,1397.6 3130.55,1353.17 ccw(c3208.33,1430.96) 3208.33,1320.95 3498.15,1320.95 cw(c3498.15,1309.73) v1@3506.07,1317.67 ; v1@3506.08,1317.66 ccw(c3511,1322.58) v1(3511,1315.63)
  SIGNAL (Bottom) w5.1: C69.1@3478.27,1305 3485.56,1312.29 3485.56,1317.96 3488.55,1320.95 3502.79,1320.95 3508.12,1315.63 v1(3511,1315.63)
SSRX3_N: J5.5 U10.29 | length 985.1
  SIGNAL w5.1: U10.29@2121.89,2768.89 U10.29@2130.24,2777.24 ; U10.29@2130.28,2777.25 ccw(c2121.02,2803.73) 2140.85,2783.9 ; 2140.88,2783.91 2199.97,2843.01 cw(c2226.9,2815.99) 2226.9,2854.14 2354.84,2854.14 cw(c2354.84,2815.99) 2381.66,2843.13 2423.05,2801.74 ccw(c2441.73,2820.42) 2441.73,2794 2465.6,2794 ccw(c2465.6,2825.18) 2487.62,2803.11 2510.82,2826.3 cw(c2569.9,2767.22) 2529.22,2840.21 cw(c2569.9,2767.22) 2569.9,2850.78 2921,2850.78 cw(c2921,2812.63) 2959.15,2812.63 2959.15,2810.55 ccw(c2987.2,2810.55) 2987.2,2782.5 J5.5@2993.5,2782.5
SSRX3_P: J5.6 U10.28 | length 987.5
  SIGNAL w5.1: U10.28@2132.99,2757.78 2141.34,2766.14 cw(c2167.83,2756.92) 2148,2776.75 2207.1,2835.86 cw(c2226.9,2815.99) 2226.9,2844.04 2354.84,2844.04 cw(c2354.84,2815.99) 2374.58,2835.92 2418.86,2791.64 ccw(c2437.54,2810.32) 2437.54,2783.9 2469.78,2783.9 ccw(c2469.78,2815.08) 2491.83,2793.03 2517.89,2819.1 cw(c2570,2766.99) 2535.25,2831.97 cw(c2570,2766.99) 2570,2840.68 2709,2840.68 2724,2840.68 2734,2830.68 2749,2830.68 2759.51,2841.19 2774.51,2841.19 2785.02,2830.68 2800.02,2830.68 2810.02,2840.68 2825.02,2840.68 2835.02,2830.68 2850.02,2830.68 2860.02,2840.68 2876,2840.68 2921,2840.68 cw(c2921,2812.63) 2949.05,2812.63 2949.05,2810.55 cw(c2921,2810.55) 2921,2782.5 J5.6@2914.7,2782.5
SSRX4_N: C92.1 U10.35 | length 2274.8
  SIGNAL w5.1: U10.35@2055.06,2835.71 2063.95,2844.59 2067.98,2844.59 2138.11,2914.72 cw(c2153.5,2899.33) 2138.17,2914.78 cw(c2153.5,2899.33) 2153.5,2921.1 3106.25,2921.1 cw(c3106.25,2815.59) 3180.79,2890.26 cw(c3106.25,2815.59) 3180.85,2890.19 3185.52,2885.53 cw(c3107.89,2807.9) 3217.67,2807.9 3217.67,2183.38 ccw(c3295.05,2183.38) 3240.3,2128.7 ccw(c3295.05,2183.38) 3240.34,2128.66 ccw(c3295.05,2183.38) 3240.38,2128.62 ccw(c3295.05,2183.38) 3295.05,2106 3377.71,2106 cw(c3377.71,2080.48) 3395.73,2098.55 ; 3395.76,2098.53 3398.72,2095.57 ccw(c3409.62,2106.47) 3409.62,2091.05 3502.79,2091.05 3508.12,2096.37 v1(3511,2096.37)
  SIGNAL (Bottom) w5.1: C92.1@3478.27,2107 3485.56,2099.71 3485.56,2094.04 3488.55,2091.05 3502.79,2091.05 3508.12,2096.37 v1(3511,2096.37)
SSRX4_P: C93.1 U10.34 | length 2275.3
  SIGNAL w5.1: U10.34@2066.24,2824.53 2075.12,2833.42 2075.12,2837.45 2145.23,2907.56 cw(c2153.53,2899.26) 2153.53,2911 3104.35,2911 cw(c3104.35,2811) 3175.06,2881.71 3178.28,2878.48 cw(c3107.57,2807.77) 3207.57,2807.77 3207.57,2179.19 ccw(c3284.95,2179.19) 3230.2,2124.52 ccw(c3284.95,2179.19) 3230.24,2124.48 3235.48,2119.23 ccw(c3291.82,2175.57) 3291.82,2095.9 3373.53,2095.9 cw(c3373.53,2070.38) 3391.55,2088.45 ; 3391.58,2088.42 ccw(c3409.62,2106.47) 3391.63,2088.37 ccw(c3409.62,2106.47) 3409.55,2080.95 ccw(c3409.62,2106.47) 3409.62,2080.95 3411,2080.95 3435,2080.95 3445,2070.95 3460,2070.95 3470,2080.95 3485,2080.95 3502.79,2080.95 3508.12,2075.63 v1(3511,2075.63)
  SIGNAL (Bottom) w5.1: C93.1@3478.27,2065 3485.56,2072.29 3485.56,2077.96 3488.55,2080.95 3502.79,2080.95 3508.12,2075.63 v1(3511,2075.63)
SSRX_N: U9.17 U10.53 | length 497.4
  SIGNAL w5.1: U10.53@1821.03,2710.68 1827.35,2704.35 1831.31,2704.35 ; U10.53@1825.08,2710.58 1831.31,2704.35 ; 1831.31,2704.35 1840.26,2695.4 ; 1840.26,2695.4 1845.37,2690.29 cw(c1838.94,2683.87) v1@1848.03,2683.87 ; 1840.26,2695.4 1848.03,2687.63 v1@1848.03,2683.87 ; v1@1848.03,2682.98 ccw(c1854.98,2682.98) v1(1850.07,2678.07) 1848.03,2680.1 v1@1848.03,2682.98 ; v1@1848.03,2682.98 v1@1848.03,2683.87
  SIGNAL (Bottom) w5.1: v1(1850.07,2678.07) ccw(c1854.98,2682.98) 1854.98,2676.03 1855.87,2676.03 cw(c1855.87,2666.94) 1862.29,2673.37 1863.7,2671.96 ccw(c1873.52,2681.78) 1873.52,2667.9 1896.1,2667.9 ccw(c1896.1,2701.81) 1920.08,2677.83 cw(c1929.8,2668.12) 1929.8,2681.86 2091.2,2681.86 ccw(c2091.2,2699.72) 2103.83,2687.09 cw(c2109.54,2681.38) 2109.54,2689.45 2231.41,2689.45 ; U9.17@2246.07,2686.63 U9.17@2241.05,2686.63 ; 2231.41,2689.45 cw(c2231.41,2684.63) 2234.82,2688.04 ccw(c2238.23,2691.45) U9.17@2238.23,2686.63 ; 2231.41,2689.45 U9.17@2233.4,2689.45 ; U9.17@2233.4,2689.45 2236.23,2686.63 U9.17@2238.23,2686.63 ; U9.17@2233.4,2689.45 2234.23,2689.45 cw(c2234.23,2684.63) 2237.64,2688.04 ccw(c2241.05,2691.45) U9.17@2241.05,2686.63 ; U9.17@2238.23,2686.63 U9.17@2241.05,2686.63
SSRX_P: U9.18 U10.52 | length 520.4
  SIGNAL w5.1: U10.52@1822.09,2731.82 U10.52@1829.57,2724.34 U10.52@1832.12,2721.78 ; 1838.45,2711.49 1838.45,2715.46 1832.13,2721.78 cw(c1830.58,2720.24) 1832.76,2720.24 1832.76,2720.09 cw(c1830.93,2720.09) 1832.23,2718.79 ccw(c1832.76,2718.26) 1832.23,2717.72 1838.45,2711.49 ; 1838.45,2711.49 1844.45,2705.5 ; 1844.45,2705.5 1852.51,2697.44 ccw(c1858.93,2703.86) 1852.55,2697.39 ; 1844.45,2705.5 1852.55,2697.39 ; 1852.55,2697.39 ccw(c1858.93,2703.86) v1@1858.93,2694.77 ; 1852.55,2697.39 1855.17,2694.77 v1@1858.93,2694.77 ; v1@1858.93,2694.77 v1@1859.82,2694.77 ; v1@1859.82,2694.77 cw(c1859.82,2687.82) v1(1864.74,2692.74) 1862.7,2694.77 v1@1859.82,2694.77
  SIGNAL (Bottom) w5.1: v1(1864.74,2692.74) cw(c1859.82,2687.82) 1866.77,2687.82 1866.77,2686.83 ccw(c1875.61,2686.83) 1869.35,2680.59 ; 1869.37,2680.57 ccw(c1875.61,2686.83) 1875.61,2678 1896.02,2678 ccw(c1896.02,2702.01) 1913,2685.03 cw(c1929.72,2668.3) 1913.04,2685.07 cw(c1929.72,2668.3) 1929.72,2691.96 1931,2691.96 1946,2691.96 1956,2701.96 1971,2701.96 1981,2691.96 1996,2691.96 2091.14,2691.96 ccw(c2091.14,2699.88) 2096.74,2694.28 cw(c2109.48,2681.54) 2109.48,2699.55 2231.41,2699.55 ; U9.18@2246.07,2702.38 U9.18@2241.05,2702.38 ; 2231.41,2699.55 ccw(c2231.41,2704.38) 2234.82,2700.97 cw(c2238.23,2697.56) U9.18@2238.23,2702.38 ; 2231.41,2699.55 U9.18@2233.4,2699.55 ; U9.18@2233.4,2699.55 2236.23,2702.38 U9.18@2238.23,2702.38 ; U9.18@2233.4,2699.55 2234.23,2699.55 ccw(c2234.23,2704.38) 2237.64,2700.97 cw(c2241.05,2697.56) U9.18@2241.05,2702.38 ; U9.18@2238.23,2702.38 U9.18@2241.05,2702.38
SSTX1_N: C99.1 U3.22 | length 2675.3
  SIGNAL w5.1: C99.1@2497.22,2387.9 2502.51,2382.61 cw(c2497.67,2377.78) 2504.51,2377.78 2504.51,2377.05 ccw(c2509.61,2377.05) 2506,2373.45 ccw(c2509.61,2377.05) 2509.61,2371.95 2693.05,2371.95 cw(c2693.05,2262.17) 2770.67,2339.8 2792.03,2318.44 cw(c2717.27,2243.68) 2823,2243.68 2823,586.7 ccw(c2894.7,586.7) 2844,536 2871.45,508.55 ccw(c2937.72,574.82) 2871.49,508.51 ccw(c2937.72,574.82) 2937.72,481.1 3143.26,481.1 ccw(c3143.26,559.7) 3198.84,504.12 ; 3198.85,504.13 cw(c3268.68,434.29) 3198.89,504.18 cw(c3268.68,434.29) 3268.68,533.06 3318.15,533.06 ccw(c3318.15,544.28) v1@3326.07,536.34 ; v1@3326.08,536.34 cw(c3331,531.43) v1(3331,538.38)
  SIGNAL (Bottom) w5.1: v1(3331,538.38) 3333.88,538.38 3339.21,533.06 3350.69,533.06 3353.52,535.88 U3.22@3364.11,535.88
SSTX1_P: C98.1 U3.23 | length 2675.7
  SIGNAL w5.1: C98.1@2497.22,2345.9 2502.51,2351.19 ccw(c2497.67,2356.03) 2504.51,2356.03 2504.51,2356.75 cw(c2509.61,2356.75) 2506,2360.36 cw(c2509.61,2356.75) 2509.61,2361.85 2692.92,2361.85 cw(c2692.92,2261.85) 2763.63,2332.56 2784.75,2311.44 ; 2784.78,2311.41 cw(c2716.78,2243.48) 2812.9,2243.48 2812.9,582.51 ccw(c2884.6,582.51) 2833.31,532.42 ccw(c2884.6,582.51) 2833.9,531.82 2864.36,501.36 ccw(c2937.65,574.65) 2864.44,501.28 ccw(c2937.65,574.65) 2937.5,471 ccw(c2937.65,574.65) 2937.65,471 3143.4,471 ccw(c3143.4,559.37) 3205.88,496.88 cw(c3268.83,433.93) 3268.83,522.96 3318.15,522.96 cw(c3318.15,511.74) v1@3326.07,519.68 ; v1@3326.08,519.67 ccw(c3331,524.59) v1(3331,517.63)
  SIGNAL (Bottom) w5.1: v1(3331,517.63) 3333.88,517.63 3339.21,522.96 3350.69,522.96 3353.52,520.13 U3.23@3364.11,520.13
SSTX2_N: C103.1 U4.22 | length 1911.9
  SIGNAL w5.1: C103.1@2493.72,2512 2499.01,2506.71 cw(c2494.17,2501.87) 2501.01,2501.87 2501.01,2501.15 ccw(c2506.11,2501.15) 2502.5,2497.54 ccw(c2506.11,2501.15) 2506.11,2496.05 2774.83,2496.05 cw(c2774.83,2386.39) 2852.37,2463.93 2996.9,2319.4 cw(c2919.28,2241.77) 3029.06,2241.77 3029.06,2100.74 cw(c2971.2,2100.74) 3012.11,2059.83 ccw(c3053.42,2018.52) 2995,2018.52 2995,1853.83 ccw(c3030.8,1853.83) 3005.49,1828.51 cw(c2965.91,1788.92) 3021.89,1788.92 3021.89,1440.82 ccw(c3121.89,1440.82) 3051.18,1370.11 3107.94,1313.35 ccw(c3178.65,1384.06) 3178.65,1284.06 3318.15,1284.06 ccw(c3318.15,1295.28) v1@3326.07,1287.34 ; v1@3326.08,1287.34 cw(c3331,1282.43) v1(3331,1289.38)
  SIGNAL (Bottom) w5.1: v1(3331,1289.38) 3333.88,1289.38 3339.21,1284.06 3350.69,1284.06 3353.52,1286.88 U4.22@3364.11,1286.88
SSTX2_P: C102.1 U4.23 | length 1911.9
  SIGNAL w5.1: C102.1@2493.72,2470 2499.01,2475.29 ccw(c2494.17,2480.13) 2501.01,2480.13 2501.01,2480.85 cw(c2506.11,2480.85) 2502.5,2484.46 cw(c2506.11,2480.85) 2506.11,2485.95 2774.65,2485.95 cw(c2774.65,2385.95) 2845.36,2456.66 2989.67,2312.35 cw(c2918.96,2241.64) 3018.96,2241.64 3018.96,2100.86 cw(c2970.92,2100.86) 3004.91,2066.91 ccw(c3053.14,2018.64) 2984.9,2018.64 2984.9,1853.77 ccw(c3030.66,1853.77) 2998.28,1821.44 ; 2998.31,1821.41 cw(c2965.74,1788.86) 3011.79,1788.86 3011.79,1440.78 ccw(c3121.8,1440.78) 3043.95,1363.05 ccw(c3121.8,1440.78) 3044.01,1362.99 3100.82,1306.18 ccw(c3178.61,1383.97) 3100.88,1306.12 ccw(c3178.61,1383.97) 3178.61,1273.96 3318.15,1273.96 cw(c3318.15,1262.74) v1@3326.07,1270.68 ; v1@3326.08,1270.67 ccw(c3331,1275.59) v1(3331,1268.63)
  SIGNAL (Bottom) w5.1: v1(3331,1268.63) 3333.88,1268.63 3339.21,1273.96 3350.69,1273.96 3353.52,1271.13 U4.23@3364.11,1271.13
SSTX3_N: C105.1 J5.9 | length 464.5
  SIGNAL w5.1: C105.1@2458,2735 2458,2724.69 ccw(c2486.04,2723.78) 2466.2,2703.94 ; 2466.24,2703.9 2505.78,2664.37 ccw(c2525.58,2684.24) 2525.58,2656.18 2597,2656.18 2628,2656.18 2638,2666.18 2653,2666.18 2663,2656.18 2678,2656.18 2691.72,2656.18 ccw(c2691.72,2686.28) 2713,2665 2722.81,2674.81 ccw(c2704.28,2693.33) 2730.48,2693.33 2728.28,2725.57 ccw(c2698.2,2723.5) 2725.09,2737.14 cw(c2759.06,2754.5) 2720.91,2754.47 ccw(c2692.86,2754.45) 2692.86,2782.5 J5.9@2678.5,2782.5
SSTX3_P: C104.1 J5.8 | length 464.4
  SIGNAL w5.1: C104.1@2428,2705 C104.1@2438.31,2705 ; C104.1@2438.34,2705 cw(c2439.22,2676.96) 2459.06,2696.8 ccw(c2486.04,2723.78) 2459.09,2696.76 2498.64,2657.22 ccw(c2525.58,2684.24) 2525.58,2646.09 2691.81,2646.09 ccw(c2691.81,2686.06) 2720.08,2657.79 2732.91,2670.63 ccw(c2714.38,2689.15) 2740.58,2689.15 2740.59,2694.04 ; 2740.57,2694.04 2738.36,2726.26 ccw(c2698.2,2723.5) 2734.09,2741.72 cw(c2759.06,2754.5) 2757.12,2782.49 J5.8@2757.3,2782.5
SSTX4_N: C107.1 U7.22 | length 1664.1
  SIGNAL w5.1: C107.1@2477.72,2886 2483.01,2880.71 cw(c2478.17,2875.87) 2485.01,2875.87 2485.01,2875.15 ccw(c2490.11,2875.15) 2486.5,2871.54 ccw(c2490.11,2875.15) 2490.11,2870.05 2497,2870.05 ccw(c2497,2887.25) 2509.15,2875.07 ; 2509.16,2875.09 2511.09,2877.02 cw(c2534.09,2854.02) 2511.14,2877.07 cw(c2534.09,2854.02) 2534.09,2886.54 3100.22,2886.54 cw(c3100.22,2820.09) 3147.16,2867.13 cw(c3100.22,2820.09) 3147.2,2867.08 3150.21,2864.07 cw(c3096.21,2810.07) 3172.58,2810.07 3172.58,2159.94 ccw(c3272.58,2159.94) 3201.87,2089.23 3220.26,2070.84 ; 3220.28,2070.82 ccw(c3284.92,2135.5) 3284.92,2044.06 3322.79,2044.06 3328.12,2049.38 v1(3331,2049.38)
  SIGNAL (Bottom) w5.1: v1(3331,2049.38) 3333.88,2049.38 3339.21,2044.06 3350.69,2044.06 3353.52,2046.88 U7.22@3364.11,2046.88